# Altium PCB PCB1.PcbDoc
Units mil, origin at the board's own origin, x right, y up, seen from the top; angles counter-clockwise.
Board outline 6000 x 4000 mil, 2 copper layers (Top Layer, Bottom Layer); 28 components, 30 nets, 128 pads, 6 vias.
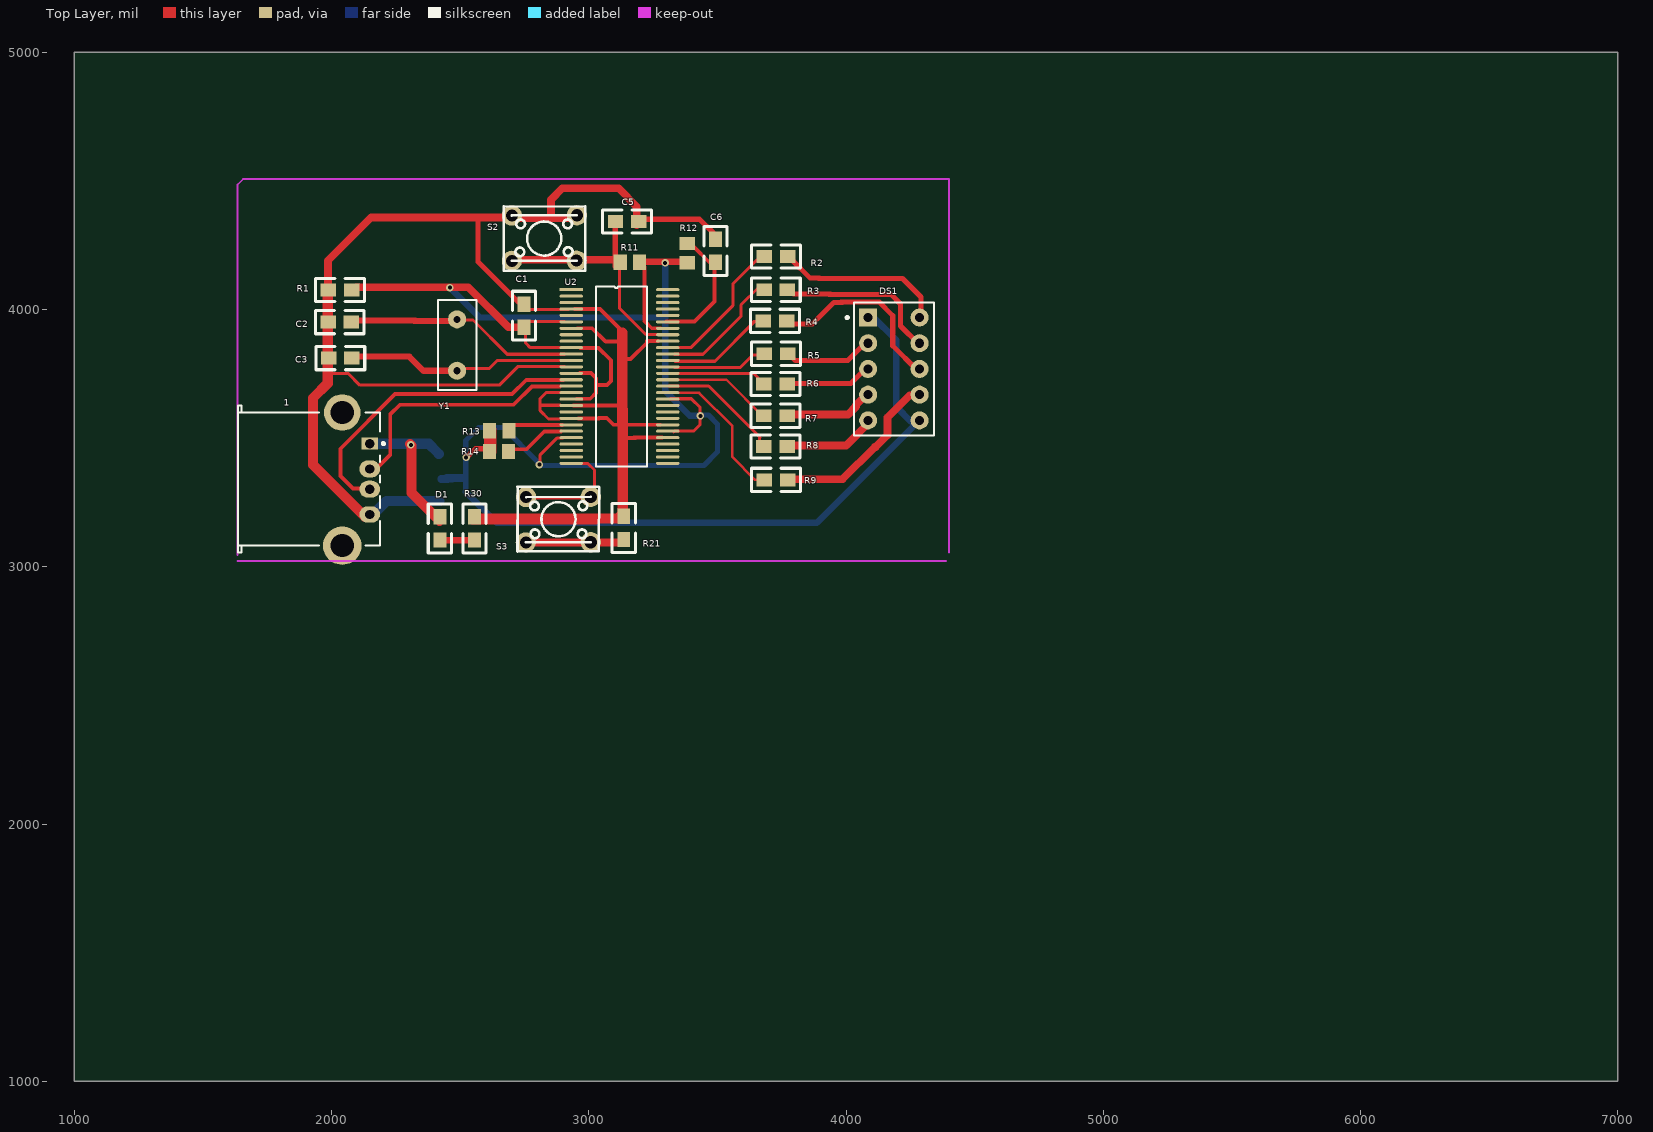
[diagram p0: Top Layer view]
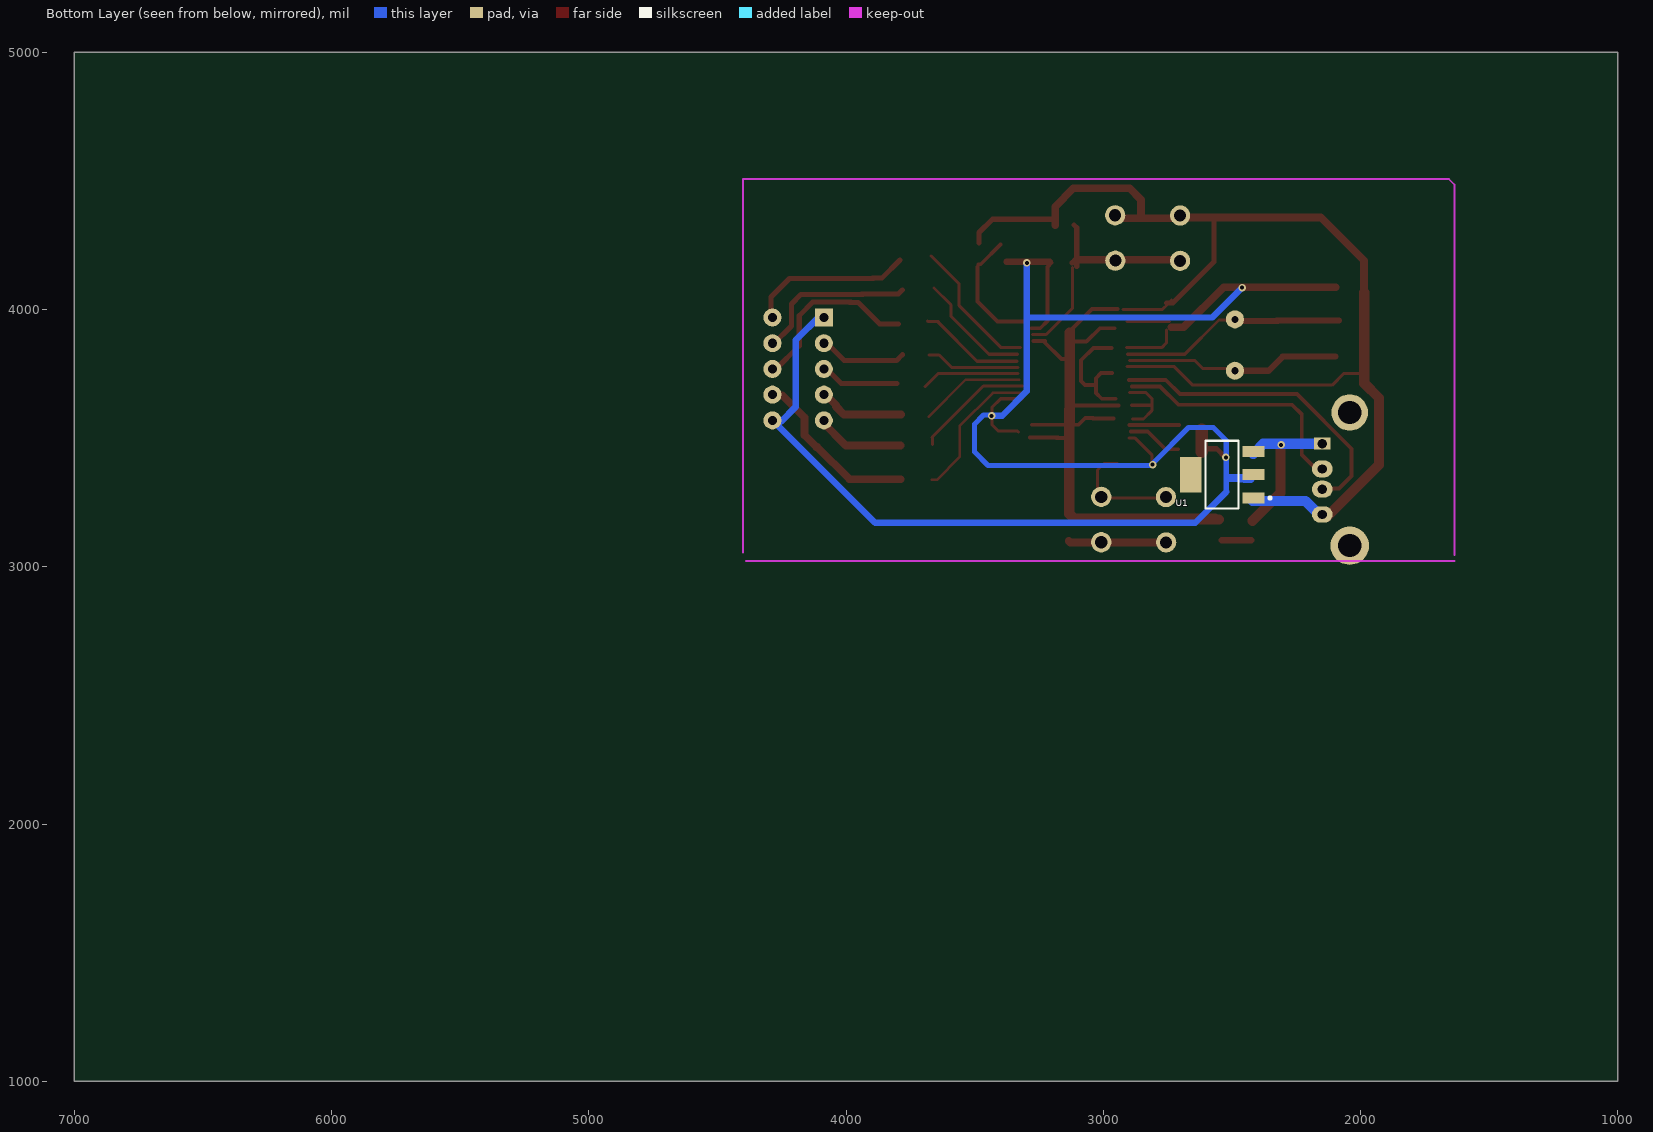
[diagram p1: Bottom Layer view, seen from below]

## Layer stack, top to bottom
Top Layer: signal copper 1.4
Dielectric: dielectric 12.6, FR-4, Dk 4.8
Bottom Layer: signal copper 1.4

## Board outline
1000,1000 7000,1000 7000,5000 1000,5000

## Design rules (kind name [scope] priority, off if disabled: settings)
Clearance [All] p1: gap=10
ComponentClearance [All] p1: gap=10 collisioncheckmode=3 verticalgap=10
DiffPairsRouting DiffPair_DiffPairsRouting [All] p1: maxlimit=10 minlimit=10 mostfreqgap=10 maxuncoupledlength=500
DiffPairsRouting [All] p2: maxlimit=10 minlimit=10 mostfreqgap=10 maxuncoupledlength=500
MatchedLengths DiffPair_MatchedLengths [All] p1: tolerance=1000 checknetsindiffpair=TRUE checkdiffpairvsdiffpair=TRUE checkothers=TRUE
PolygonConnect [All] p1: connectstyle=Relief reliefconductorwidth=10 reliefentries=4 polygonreliefangle="90 Angle"
RoutingVias [All] p1: holewidth=28 width=50 viastyle="Through Hole" minholewidth=28 minwidth=50 maxholewidth=28 maxwidth=50
SolderMaskExpansion [All] p1: expansion=4
TestPointUsage [All] p1: valid=0 allowmultiple=FALSE
Testpoint [All] p1: side=15 testpointundercomponent=TRUE minsize=40 maxsize=100 preferedsize=60 minholesize=0 maxholesize=40 preferedholesize=32 testpointgrid=1 style=1023 order=0-112345678
Width DiffPair_Width [All] p1: maxlimit=50 minlimit=10 preferedwidth=10 toplayer_prefwidth=15 bottomlayer_prefwidth=15 minimp=50.000000 maximp=50.000000 favimp=50.000000
Width [All] p2: maxlimit=78.74 minlimit=10 preferedwidth=10 toplayer_prefwidth=39.37 bottomlayer_prefwidth=39.37 minimp=50.000000 maximp=50.000000 favimp=50.000000
17 further rules are at their usual default settings.

## Components (designator, comment, footprint, x,y, rotation, side; value= is the part's Value field where it differs from the comment)
1 "P10" 787616 1637,3341 r180 top
C1 "10uF" 0805 2748,4021 r270 top
C2 "12pF" 0805 1987,3951 r0 top
C3 "12pF" 0805 1989,3811 r0 top
C5 "1uF" 0805 3194,4342 r180 top
C6 "10uF" 0805 3493,4273 r270 top
D1 "Diode" 0805 2421,3194 r270 top
DS1 "Dpy Red-CA" LEDDIP-10 4186,3769 r0 top
R1 "100K" 0805 1988,4076 r0 top
R2 "100K" 0805 3773,4206 r180 top
R3 "100K" 0805 3772,4077 r180 top
R4 "100K" 0805 3769,3956 r180 top
R5 "100k" 0805 3773,3828 r180 top
R6 "100k" 0805 3771,3711 r180 top
R7 "100K" 0805 3771,3587 r180 top
R8 "100K" 0805 3771,3468 r180 top
R9 "100K" 0805 3773,3338 r180 top
R11 "100k" 2012[0805] 3160,4184 r0 top
R12 "100k" 2012[0805] 3383,4219 r270 top
R13 "2.2k" 2012[0805] 2652,3529 r180 top
R14 "2.2k" 2012[0805] 2651,3448 r180 top
R21 "2.2k" 0805 3136,3196 r270 top
R30 "Res2" 0805 2556,3104 r90 top
S2 "SW-PB" SW2 2830,4249 r0 top
S3 "SW-PB" SW2 2879,3212 r180 top
U1 "AMS1117" SOT223 2538,3358 r90 bottom
U2 "U1" "SOP56 -1" 2932,4077 r0 top
Y1 "XTAL" RAD-0.2 2488,3862 r270 top

## Footprints (in the part's own frame and the unit in brackets; to place one, negate y for a bottom-side part, rotate by r counter-clockwise, add the part's x,y. Pads: shape width x height; smd on the part's side, far side on the other; paste and mask are expansions set on the pad)
0805 [mil]
  rect 60x50 smd: 1(0,0) 2(90,0)
  silkscreen extent -50,-45 140,45
2012[0805] [mm] "Chip Resistor; Body 2.0 x 1.3 mm (LxW typ)"
  rect 1.3x1.5 smd: 1(-0.95,0) 2(0.95,0)
787616 [mm] "Connector; USB1.1, Type A, Thru-Hole; 4 Position; Right Angle"
  rect 1.606x1.2 hole 0.92: 1(-12.99,-3.5)
  oval 2.057x1.676 hole 0.92: 2(-12.99,-1) 3(-12.99,1)
  oval 2.057x1.6 hole 0.92: 4(-12.99,3.5)
  round 3.8 hole 2.3: 5(-10.28,6.57)
  round 3.6 hole 2.3: 6(-10.28,-6.57)
  silkscreen extent -14.47,-7.25 0,7.25
LEDDIP-10 [mm] "LED, 7-Segment Display, 7.62 mm, RHD; 10 Leads; Row Space 5.08 mm; Pitch 2.54 mm"
  rect 1.779x1.779 hole 0.9: 1(-2.54,5.08)
  round 1.779 hole 0.9: 2(-2.54,2.54) 3(-2.54,0) 4(-2.54,-2.54) 5(-2.54,-5.08) 6(2.54,-5.08) 7(2.54,-2.54) 8(2.54,0) 9(2.54,2.54) 10(2.54,5.08)
  silkscreen extent -4.72,-6.55 3.95,6.55
RAD-0.2 [mm] "Jumper Wire; 2 Leads"
  round 1.784 hole 0.7: 1(-2.54,0) 2(2.54,0)
  silkscreen extent -4.44,-1.91 4.44,1.91
"SOP56 -1" [mm]
  rect 2.305x0.3 smd: 1(0,0)
  oval 2.305x0.3 smd: 2(0,-0.635) 3(0,-1.27) 4(0,-1.905) 5(0,-2.54) 6(0,-3.175) 7(0,-3.81) 8(0,-4.445) 9(0,-5.08) 10(0,-5.715) 11(0,-6.35) 12(0,-6.985) 13(0,-7.62) 14(0,-8.255) 15(0,-8.89) 16(0,-9.525) 17(0,-10.16) 18(0,-10.795) 19(0,-11.43) 20(0,-12.065) 21(0,-12.7) 22(0,-13.335) 23(0,-13.97) 24(0,-14.605) 25(0,-15.24) 26(0,-15.875) 27(0,-16.51) 28(0,-17.145) 29(9.525,-17.145) 30(9.525,-16.51) 31(9.525,-15.875) 32(9.525,-15.24) 33(9.525,-14.605) 34(9.525,-13.97) 35(9.525,-13.335) 36(9.525,-12.7) 37(9.525,-12.065) 38(9.525,-11.43) 39(9.525,-10.795) 40(9.525,-10.16) 41(9.525,-9.525) 42(9.525,-8.89) 43(9.525,-8.255) 44(9.525,-7.62) 45(9.525,-6.985) 46(9.525,-6.35) 47(9.525,-5.715) 48(9.525,-5.08) 49(9.525,-4.445) 50(9.525,-3.81) 51(9.525,-3.175) 52(9.525,-2.54) 53(9.525,-1.905) 54(9.525,-1.27) 55(9.525,-0.635) 56(9.525,0)
  silkscreen extent 2.45,-17.46 7.49,0.32
SOT223 [mm] "SOT-223/SC-73; 4 Leads; Body 6.7 x 7.3 mm, inc. leads (LxW max)"
  rect 1.1x2.15 smd: 1(-2.3,-3.1) 2(0,-3.1) 3(2.3,-3.1)
  rect 3.5x2.15 smd: 4(0,3.1)
  silkscreen extent -3.35,-4.85 3.35,1.63
SW2 [mm]
  round 2 hole 1.2: 1(-3.27,2.96) 1(3.14,2.98) 2(-3.27,-1.52) 2(3.12,-1.5)
  silkscreen extent -4.09,-2.5 3.98,3.88

## Part data
1 U1: library part COMPONENT_2
C1 C2 C3 C5 C6: library part CAP, "Capacitor"
D1: "Default Diode"
DS1: "7.62 mm Black Surface HER 7-Segment Display: CA, RH DP"
R1 R2 R3 R4 R5 R6 R7 R8 R9 R11 R12 R13 R14 R21: library part RES2
R30: "Resistor"
U2: library part Component_1
Y1: library part CRYSTAL, "Crystal"

## Via types
v1: diameter 29.37, hole 15.5, Top Layer to Bottom Layer, 6 vias

## Nets (pads, with @x,y where several pads share a name; then routed paths per layer and width w, separated by ;. In a path a pad name is that pad's centre, name@x,y a point inside that pad or via, vN(x,y) a via of type N, cw(c..) or ccw(c..) an arc to the next point about the centre after c; other vN are vias at no path point)
3.3V: C1.2 DS1.1 DS1.6 R1.2 R11.2 R12.2 R13.2 R14.2 U1.2 U2.6 U2.10 U2.14 U2.18 U2.24 U2.34 U2.39 U2.50 | length 8359.6
  Top Layer w12: C1.2@2733,3935 C1.2@2742.5,3925.5 ; C1.2@2742,3954 2748,3954 U2.6@2907,3954 ; C1.2@2754,3920 2754,3871 2773,3852 U2.10@2909,3852 ; v1@2811,3402 2811,3435 2876,3500 U2.24@2899,3500 ; U2.39@3315,3653 3399,3653 3433,3619 3433,3587 3433,3553 3407,3527 3333,3527 U2.34@3329.91,3523.91
  Top Layer w15: U2.18@2952,3653 3006,3653 3028,3675 3028,3707 ; U2.14@2966,3753 3008,3753 3028,3733 ; U2.10@2967,3851 3038,3851 3086,3803 3086,3722 3071,3707 3028,3707 ; 3028,3732 3028,3707 ; R11.2@3200,4182 3216,4166 3216,4123 ; 3217,4122 3217,3955 3245,3927 U2.50@3280,3927
  Top Layer w20: v1@2525,3425 2559,3459 2613.6,3459 R14.2@2616,3459
  Top Layer w25: R11.2@3208,4185 3297,4185 R12.2@3376,4185
  Top Layer w30: R1.2@2096,4087 2460,4087 2532,4087 2688,3931 C1.2@2735,3931 ; R13.2@2614.6,3518 2617,3518 2619,3518 R13.2@2621,3516
  Top Layer w50: R14.2@2617,3448 2617,3518 2617,3529 R13.2@2617,3531
  Bottom Layer w20: 2521,3294 2522,3295 2522,3425 2522,3491 2572,3541 2668,3541 2804,3405 2804,3397 v1@2804,3396 ; v1@2809,3394 3448,3394 3501,3447 3501,3554 3465,3590 v1@3435,3590
  Bottom Layer w25: U1.2@2430,3340 2469,3340 ; v1@2461,4084 2576,3969 3297,3969 ; 2522,3291 2642,3171 3887,3171 4270,3554 4286,3554 DS1.6@4292,3554 ; v1(3297,4181) 3297,3969 ; v1@3435,3587 v1(3434,3587) 3393,3587 3297,3683 3297,3969 ; DS1.1@4101,3975 4196,3880 4196,3621 4253,3564 DS1.6@4275,3564
  Bottom Layer w30: U1.2@2426,3341 U1.2@2452,3341 ; U1.2@2449,3346 2473,3346 ; 2471,3345 2517,3345 2518,3344
  other v1: 2808,3397 2523,3425 2460,4085
A: DS1.10 R2.1 | length 634.2
  Top Layer w20: R2.1@3790,4193 3861,4122 3897,4122 ; 3893,4121 4220,4121 4292,4049 DS1.10@4292,3980
B: DS1.9 R3.1 | length 651.4
  Top Layer w20: R3.1@3781,4076 3796,4061 3940,4061 ; 3934,4059 4175,4059 4212,4022 4212,3936 4282.5,3865.5 4284,3864 DS1.9@4284,3859
C: DS1.8 R4.1 | length 695.9
  Top Layer w20: R4.1@3796,3944 3869,3944 3953,4028 3987,4028 ; 3981,4029 4129,4029 4182,3976 4182,3859 DS1.8@4274,3767
D: DS1.5 R8.1 | length 342.1
  Top Layer w30: R8.1@3788,3471 4000,3471 DS1.5@4092,3563
E: DS1.4 R7.1 | length 321
  Top Layer w30: R7.1@3786,3592 4008,3592 4039,3623 ; 4038,3628 DS1.4@4077,3667
F: DS1.2 R5.1 | length 330.3
  Top Layer w20: R5.1@3781,3824 3803,3802 4006,3802 ; 4008,3803 DS1.2@4076,3871
G: DS1.3 R6.1 | length 301.9
  Top Layer w20: 3802,3713 4019,3713 DS1.3@4079,3773
GND: 1.4 C1.1 C2.1 C3.1 C5.1 C6.1 R1.1 R21.1 R30.2 S2.1 U1.1 U2.4 U2.7 U2.13 U2.17 U2.19 U2.21 U2.33 U2.35 U2.48 | length 8576.8
  Top Layer w10: S2.1@2692,4361 2701.26,4361 S2.1@2707,4361
  Top Layer w12: 1990,3751 2065,3751 2110,3706 2652,3706 2724,3778 U2.13@2907,3778 ; C1.1@2734,4036 2745,4025 2748.5,4021.5 2770,4000 U2.4@2923,4000 ; 2812,3628 U2.19@2890,3628 ; 2885.5,3574.5 2843.5,3574.5 2811,3607 2811,3654 2834,3677 U2.17@2898,3677
  Top Layer w15: U2.19@2940,3627 3110,3627 ; U2.4@2944,4002 3044,4002 3118,3928 3118,3559 ; U2.7@2955,3927 3013,3927 3063,3877 ; U2.21@2959,3577 3041,3577 ; 3040,3578 3070,3578 3095,3553 ; 3066,3876 3115,3876 3117,3874 ; 3095,3552 3130,3552 3132,3552 U2.35@3277,3552 ; 3130,3807 3162,3807 3228,3873 3228,3876 ; 3146,3501 3182,3501 ; 3176,3502 U2.33@3285,3502 ; 3226,3877 U2.48@3271,3877
  Top Layer w20: 2570,4356 2570,4185 2730,4025 2745,4025 2748,4025 C1.1@2753,4025 ; C5.1@3198,4351 3431,4351 3483,4299 3483,4273 C6.1@3483,4259
  Top Layer w30: R1.1@1986,4080 1986,4190 2154,4358 2701.26,4358 S2.1@2708,4358 ; S2.1@2707,4355 S2.1@2953.62,4355 ; 2853,4360 2853,4427 2897,4471 3116,4471 3187,4400 3187,4342 C5.1@3187,4329
  Top Layer w40: R1.1@1985,4065 1985,3951 1985,3811 1985,3713 1928,3656 1928,3396 1.4@2130,3194 ; R30.2@2550,3184 2556,3184 3026,3184 ; R30.2@2566,3187 2567,3188 3114,3188 3129,3203 3132,3206 3132,3552 3132,3611 ; 3130,3552 3130,3807 3130,3910
  Bottom Layer w40: 1.4@2158,3200 2214,3256 2415.95,3256 U1.1@2420,3256
H: DS1.7 R9.1 | length 677.3
  Top Layer w30: R9.1@3787,3340 3986,3340 4113,3467 ; 4116,3466 4161,3511 4161,3580 4248,3667 4286,3667 DS1.7@4291,3667
Net1_2: 1.2 U2.16 | length 967.4
  Top Layer w15: 1.2@2149,3374 2167,3374 2228,3435 2228,3592 2266,3630 2708,3630 2779,3701 U2.16@2889,3701
Net1_3: 1.3 U2.15 | length 1206.9
  Top Layer w15: 1.3@2139,3304 2084,3304 2035,3353 2035,3459 2247,3671 2702,3671 2757,3726 U2.15@2901,3726
NetC2_2: C2.2 U2.11 Y1.1 | length 878.2
  Top Layer w12: Y1.1@2492,3959 2550,3959 2683,3826 U2.11@2906,3826
  Top Layer w23.62: C2.2@2083,3957 2326,3957 ; 2321,3956 2480,3956 Y1.1@2485,3961
NetC3_2: C3.2 U2.12 Y1.2 | length 834.7
  Top Layer w12: Y1.2@2480,3766 2482,3768 2485,3771 2488,3771 2613,3771 2644,3802 U2.12@2898,3802
  Top Layer w23.62: C3.2@2097,3818 2300,3818 ; 2302,3817 2357,3762 Y1.2@2478,3762
NetD1_2: D1.2 R30.1 | length 115
  Top Layer w25: D1.2@2424,3103 R30.1@2539,3103
NetR2_2: R2.2 U2.47 | length 543.7
  Top Layer w12: U2.47@3322,3852 3397,3852 3560,4015 3560,4099 R2.2@3669,4208
NetR3_2: R3.2 U2.46 | length 456.6
  Top Layer w12: U2.46@3334,3826 3444,3826 3592,3974 3592,4018 R3.2@3658,4084
NetR4_2: R4.2 U2.45 | length 416
  Top Layer w12: U2.45@3335,3799 3491,3799 3642,3950 3642,3954 ; 3641,3954 3642,3954 ; R4.2@3683,3955 3682,3954 3679,3954 3642,3954
NetR5_2: R5.2 U2.44 | length 365.9
  Top Layer w12: U2.44@3331,3775 3590,3775 3638,3823 R5.2@3677,3823
NetR6_2: R6.2 U2.43 | length 381.7
  Top Layer w12: U2.43@3331,3751 3642,3751 3681.5,3711.5 R6.2@3692,3701
NetR7_2: R7.2 U2.42 | length 411.2
  Top Layer w10: U2.42@3326,3727 3535,3727 R7.2@3678,3584
NetR8_2: R8.2 U2.41 | length 462.8
  Top Layer w12: U2.41@3312,3703 3466,3703 3666,3503 ; R8.2@3664,3475 3664,3501
NetR9_2: R9.2 U2.40 | length 555.3
  Top Layer w10: U2.40@3321,3676 3429,3676 3558,3547 3558,3427 3647,3338 R9.2@3666,3338
NetR21_2: R21.2 S3.1 | length 361.5
  Top Layer w30: S3.1@2775,3094 3007.74,3094 3128,3094 R21.2@3134,3100
RST: C5.2 R11.1 S2.2 U2.49 | length 948.2
  Top Layer w12: R11.1@3119,4164 3119,4006 3222,3903 U2.49@3274,3903
  Top Layer w15: S2.2@2952.84,4190 S2.2@2958,4190
  Top Layer w20: S2.2@2698,4179 S2.2@2701.26,4179 ; S2.2@2952.84,4179 2958,4179 S2.2@2959,4178 ; R11.1@3103,4167 3103,4184 R11.1@3103,4194 ; C5.2@3113,4328 3103,4318 R11.1@3103,4194 ; R11.1@3121,4181 3120.3,4181.7 3108,4194 R11.1@3103,4194
  Top Layer w30: S2.2@2714,4194 2952.84,4194 R11.1@3103,4194
SCL: R13.1 U2.22 | length 192
  Top Layer w15: R13.1@2706,3551 U2.22@2898,3551
SDA: R14.1 U2.23 | length 211.6
  Top Layer w15: R14.1@2710,3457 2758,3457 2827,3526 U2.23@2893,3526
SW1: S3.2 U2.28 | length 428.2
  Top Layer w12: S3.2@2781,3268 3007.74,3268 3008,3268 3009.79,3269.79 3022,3282 3022,3376 2997,3401 U2.28@2945,3401
"USB 5V": 1.1 D1.1 U1.3 | length 632.4
  Top Layer w39.37: v1@2305,3477 v1(2308,3474) 2311,3471 2311,3291 ; 2312,3287 2413,3186 D1.1@2420,3179
  Bottom Layer w39.37: 1.1@2142,3478 2148.42,3478 2308,3478 2378,3478 2411.7,3444.3 U1.3@2417,3439
WAKEUP: C6.2 R12.1 U2.51 | length 473.2
  Top Layer w15: U2.51@3302,3953 3307,3953 3411,3953 3489,4031 C6.2@3489,4166 ; R12.1@3399,4253 3476,4176 C6.2@3486,4176
pads on no net: 1.5 1.6 U1.4 U2.1 U2.2 U2.3 U2.5 U2.8 U2.9 U2.20 U2.25 U2.26 U2.27 U2.29 U2.30 U2.31 U2.32 U2.36 U2.37 U2.38 U2.52 U2.53 U2.54 U2.55 U2.56

## Keep-outs
Keep-Out Layer:
  lines w6.94: 1635,3022 4390,3022 ; 1635,3046 1635,4486 1656,4507 4400,4507 4400,3056